# Altium PCB ESP-3D.PcbDoc
Units mm, origin at the board's own origin, x right, y up, seen from the top; angles counter-clockwise.
Board outline 17.52 x 21.3 mm, 2 copper layers (Top Layer, Bottom Layer); 17 components, 16 nets, 57 pads, 29 vias.
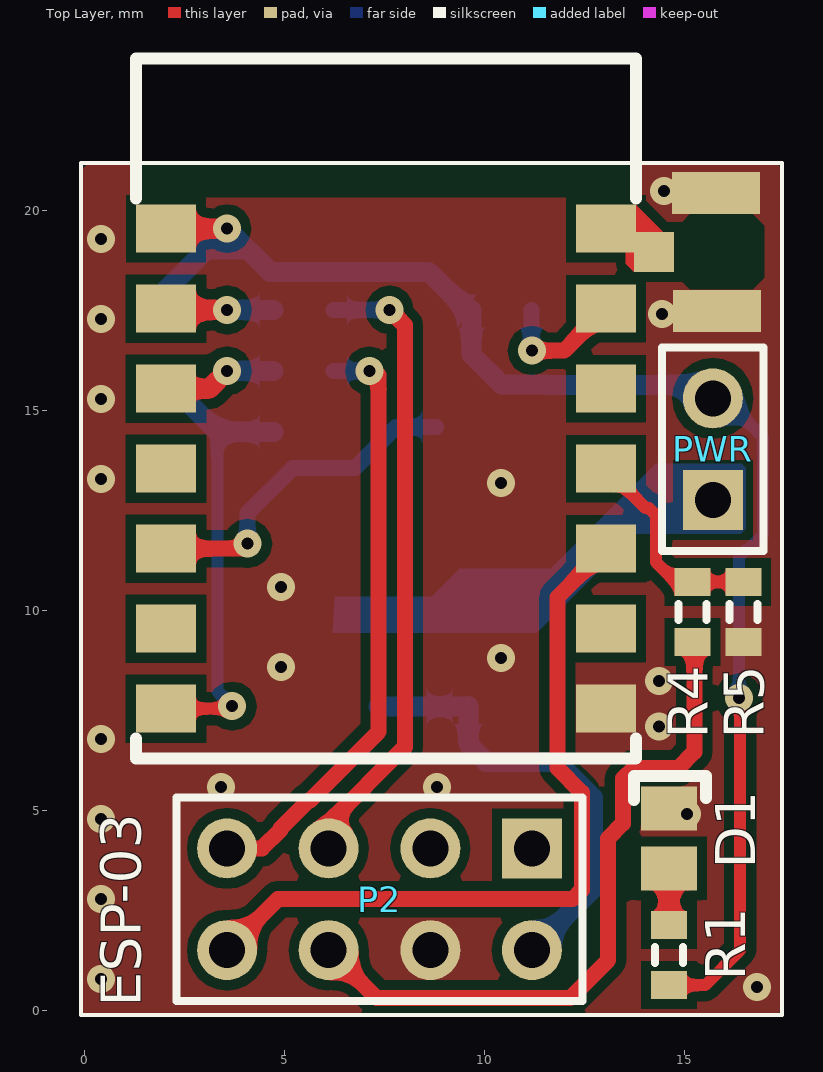
[diagram p0: Top Layer view]
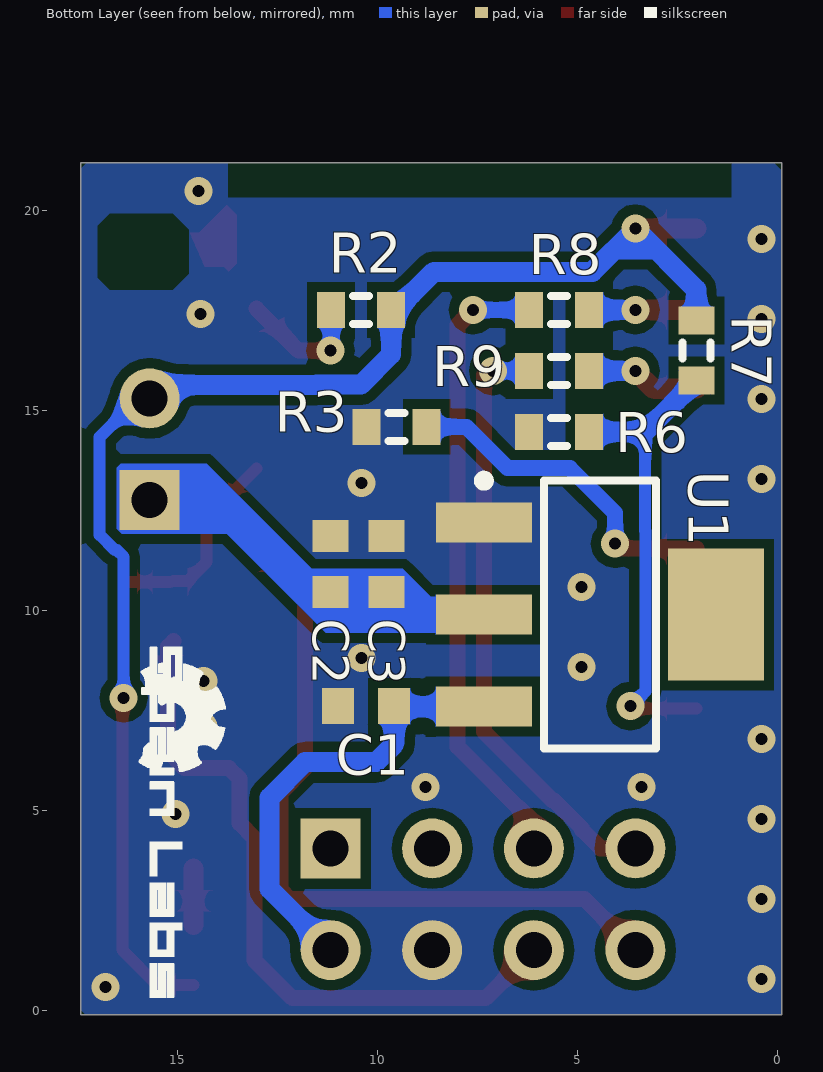
[diagram p1: Bottom Layer view, seen from below]

## Layer stack, top to bottom
Top Solder: solder mask 0.0102, Solder Resist, Dk 3.5
Top Layer: signal copper 0.0356
Dielectric 1: dielectric 0.32, FR-4, Dk 4.8
Bottom Layer: signal copper 0.0356
Bottom Solder: solder mask 0.0102, Solder Resist, Dk 3.5

## Board outline
-0.1,-0.1 -0.1,21.2 17.425,21.2 17.425,-0.1

## Design rules (kind name [scope] priority, off if disabled: settings)
Clearance [All] p1: gap=0.254
PlaneConnect [All] p1: planeconnectstyle=Direct reliefexpansion=0.508 reliefentries=4 reliefconductorwidth=0.254 reliefairgap=0.254
PolygonConnect [All] p1: connectstyle=Direct reliefconductorwidth=0.254 reliefentries=4 polygonreliefangle="90 Angle" airgapwidth=0.254
RoutingVias [All] p1: holewidth=0.3 width=0.7 viastyle="Through Hole" minholewidth=0.3 minwidth=0.7 maxholewidth=1 maxwidth=1
SolderMaskExpansion [All] p1: expansion=0.102
Width [All] p1: maxlimit=1 minlimit=0.2 preferedwidth=0.2
29 further rules are at their usual default settings.

## Components (designator, comment, footprint, x,y, rotation, side; value= is the part's Value field where it differs from the comment)
C1 "Cap Semi" 1608[0603] 10.287,7.62 r180 bottom
C2 "Cap Semi" 1608[0603] 11.176,11.176 r270 bottom
C3 "Cap Semi" 1608[0603] 9.779,11.176 r270 bottom
D1 "LED2" C0805 14.605,4.318 r90 top
ESP-03 "ESP-03" ESP-03 2.032,19.558 r0 top (schematic designator ESP1)
P2 "Header 4X2A" HDR2X4_CEN 11.176,4.064 r180 top
PWR "Header 2" HDR1X2 15.7,12.775 r90 top (schematic designator P1)
R1 "JMP" J1-0603 14.605,1.397 r90 top
R2 "JMP" J1-0603 10.414,17.526 r180 bottom
R3 "JMP" J1-0603 9.525,14.605 r180 bottom
R4 "JMP" J1-0603 15.19,9.977 r90 top
R5 "JMP" J1-0603 16.46,9.977 r90 top
R6 "JMP" J1-0603 5.461,14.478 r180 bottom
R7 "P" J1-0603 2.032,16.51 r90 bottom
R8 "JMP" J1-0603 5.461,17.526 r180 bottom
R9 "JMP" J1-0603 5.461,16.002 r180 bottom
U1 "AMS1117" SOT223_N 4.445,9.906 r180 bottom

## Footprints (in the part's own frame and the unit in brackets; to place one, negate y for a bottom-side part, rotate by r counter-clockwise, add the part's x,y. Pads: shape width x height; smd on the part's side, far side on the other; paste and mask are expansions set on the pad)
1608[0603] [mm] "Chip Capacitor, Body 1.6x0.8mm, IPC High Density"
  rect 0.8x0.9 smd: 1(-0.7,0) 2(0.7,0)
  body extent -0.87,-0.48 0.87,0.48, height 1.3
C0805 [mm] "Chip Capacitor, Body 2.0x1.3mm, IPC High Density"
  rect 1.1x1.4 smd: 1(-0.75,0) 2(0.75,0)
  body extent -1.1,-0.72 1.1,0.72, height 1.4
ESP-03 [mm]
  rect 1.5x1.2 smd: 1(0,0) 2(0,-2) 3(0,-4) 4(0,-6) 5(0,-8) 6(0,-10) 7(0,-12) 8(11,-12) 9(11,-10) 10(11,-8) 11(11,-6) 12(11,-4) 13(11,-2) 14(11,0)
  silkscreen extent -0.75,-13.25 11.75,4.25, body extent -0.65,-13.25 11.65,4.05, height 3.42
HDR1X2 [mm] "Connector; Header; 2 Position"
  rect 1.5x1.5 hole 0.9: 1(0,0)
  round 1.5 hole 0.9: 2(2.54,0)
  silkscreen extent -1.27,-1.27 3.81,1.27
HDR2X4_CEN [mm] "Connector; Header; 4x2 Position"
  rect 1.5x1.5 hole 0.9: 1(0,0)
  round 1.5 hole 0.9: 2(2.54,0) 3(5.08,0) 4(7.62,0) 5(0,2.54) 6(2.54,2.54) 7(5.08,2.54) 8(7.62,2.54)
  silkscreen extent -1.27,-1.27 8.89,3.81
J1-0603 [mm] "Chip Resistor, Body 1.6x0.8mm, IPC High Density"
  rect 0.7x0.9 smd: 1(-0.75,0) 2(0.75,0)
  silkscreen extent -0.2,-0.35 0.2,0.35, body extent -0.85,-0.48 0.85,0.48, height 0.9
SOT223_N [mm] "SOT223, 4-Leads, Body 6.5x3.5mm, Pitch 2.3mm, Lead Span 7mm, IPC Medium Density"
  rect 2.4x1 smd: 1(-2.9,2.3) 2(-2.9,0) 3(-2.9,-2.3)
  rect 2.4x3.3 smd: 4(2.9,0)
  silkscreen extent -3.03,-3.35 1.4,3.47, body extent -1.85,-3.35 1.85,3.35, height 1.7

## Part data
C1 C2 C3: "Capacitor (Semiconductor SIM Model)"
D1: "Typical RED, GREEN, YELLOW, AMBER GaAs LED"
P2: "Header, 4-Pin, Dual row"
PWR: "Header, 2-Pin"
R1 R2 R3 R4 R5 R6 R7 R8 R9: library part Res3, "Resistor"

## Free pads (board coordinates)
  rect 2.2x1.05 smd: 16(15.775,20.45) 17(15.8,17.5)
  rect 1x1 smd: 18(14.225,18.975)

## Via types
v1: diameter 0.7, hole 0.3, Top Layer to Bottom Layer, tented both sides, 29 vias

## Nets (pads, with @x,y where several pads share a name; then routed paths per layer and width w, separated by ;. In a path a pad name is that pad's centre, name@x,y a point inside that pad or via, vN(x,y) a via of type N, cw(c..) or ccw(c..) an arc to the next point about the centre after c; other vN are vias at no path point)
3.3V: C2.2 C3.2 PWR.1 U1.2 | length 9.5
  Bottom Layer w0.3: C2.2@11.325,10.475 11.326,10.476 13.625,12.775 PWR.1
  Bottom Layer w0.5: U1.2 9.209,9.906 C3.2 C2.2 C2.2@11.326,10.476
ANT: ESP-03.14 pad.18
GND: C1.1 C2.1 C3.1 D1.2 ESP-03.8 P2.6 pad.16 pad.17 R3.1 R5.1 R6.1 U1.1
  other v1: 16.8,0.6 0.4,0.8 0.4,2.8 0.4,4.8 15.05,4.925 3.4,5.6 8.8,5.6 0.4,6.8 14.351,7.112 14.351,8.255 4.9,8.6 10.401,8.825 4.9,10.6 10.4,13.2 0.4,13.3 0.4,15.3 0.4,17.3 14.425,17.425 0.4,19.3 14.475,20.5
IO12: ESP-03.3 R9.2 | length 2.9
  Top Layer w0.5: ESP-03.3 3.112,15.558 v1(3.556,16.002)
  Bottom Layer w0.5: v1(3.556,16.002) R9.2
IO14: ESP-03.2 R8.2 | length 2.6
  Top Layer w0.5: ESP-03.2@2.064,17.526 v1(3.556,17.526)
  Bottom Layer w0.5: v1(3.556,17.526) R8.2
NetD1_1: D1.1 R1.2 | length 1.4
  Top Layer w0.5: R1.2 D1.1
NetESP1_5: ESP-03.5 R3.2 | length 8.5
  Top Layer w0.4: ESP-03.5 3.938,11.558 v1(4.064,11.684)
  Bottom Layer w0.4: v1(4.064,11.684) 4.064,12.446 5.192,13.574 6.749,13.574 7.78,14.605 R3.2
NetESP1_7: ESP-03.7 R6.2 R7.1 | length 11.9
  Top Layer w0.3: ESP-03.7 3.621,7.558 v1(3.683,7.62)
  Bottom Layer w0.3: 3.314,14.478 3.314,12 3.31,11.996 3.31,7.993 v1(3.683,7.62)
  Bottom Layer w0.5: R7.1 3.314,14.478 R6.2
NetESP1_11: ESP-03.11 R4.2 R5.2 | length 5
  Top Layer w0.3: ESP-03.11 14.015,12.575 14.1,12.575 14.275,12.4 14.275,11.225 14.75,10.75 R4.2@15.1,10.75 ; R4.2 R5.2@16.273,10.727
NetESP1_13: ESP-03.13 R2.1 | length 3.3
  Top Layer w0.4: v1(11.176,16.51) 11.984,16.51 ESP-03.13
  Bottom Layer w0.4: R2.1 11.164,16.522 v1(11.176,16.51)
NetP2_3: P2.3 R8.1 | length 15.8
  Top Layer w0.4: P2.3 6.096,4.699 8.001,6.604 8.001,17.145 v1(7.62,17.526)
  Bottom Layer w0.4: R8.1 v1(7.62,17.526)
NetP2_4: P2.4 R9.1 | length 15.1
  Top Layer w0.4: P2.4 4.426,4.064 4.892,4.53 4.892,4.563 5.597,5.268 5.63,5.268 7.347,6.985 7.347,15.894 7.239,16.002 v1(7.112,16.002)
  Bottom Layer w0.4: R9.1 v1(7.112,16.002)
RX: P2.7 R4.1 | length 17.5
  Top Layer w0.4: P2.7 7.3,0.32 12.131,0.32 13.081,1.27 13.081,4.318 13.451,4.688 13.451,5.806 13.717,6.072 14.835,6.072 15.24,6.477 15.24,9.11 R4.1@15.1,9.25
TX: ESP-03.10 P2.8 | length 18.8
  Top Layer w0.4: P2.8 4.826,2.794 12.192,2.794 12.427,3.029 12.427,5.461 11.811,6.077 11.811,10.337 ESP-03.10
VCC: ESP-03.1 PWR.2 R1.1 R2.2 R7.2 | length 35.6
  Top Layer w0.3: R1.1 15.506,0.647 16.383,1.524 16.383,7.792 v1(16.35,7.825)
  Top Layer w0.5: ESP-03.1 v1(3.556,19.558)
  Bottom Layer w0.3: PWR.2@15.925,15.375 16.95,14.35 16.95,11.904 16.567,11.521 16.517,11.521 16.35,11.354 v1(16.35,7.825)
  Bottom Layer w0.5: R7.2 2.032,18.034 v1(3.556,19.558) 4.634,18.48 8.595,18.48 R2.2@9.65,17.425 ; R2.2 9.664,16.411 10.419,15.656 11.53,15.656 11.524,15.65 15.175,15.65 PWR.2@15.55,15.275
VIN: C1.2 P2.5 U1.3 | length 11.3
  Bottom Layer w0.5: U1.3 C1.2@9.573,7.606 ; C1.2 9.587,6.669 10.033,6.223 11.811,6.223 12.7,5.334 12.7,3.048 P2.5
pads on no net: ESP-03.4 ESP-03.6 ESP-03.9 ESP-03.12 P2.1 P2.2 U1.4

## Polygon pours and split planes (outlines as drawn)
GND on Bottom Layer "Top Layer-No Net" (solid, pour order 4): -0.1,-0.1 -0.1,21 0.1,21.2 17.25,21.2 17.275,21.2 17.425,21.05 17.425,0.025 17.3,-0.1 17.225,-0.1
GND on Top Layer "Top Layer-No Net" (solid, pour order 3): -0.1,-0.1 -0.1,21 0.1,21.2 17.25,21.2 17.275,21.2 17.425,21.05 17.425,0.025 17.3,-0.1 17.225,-0.1

## Other copper
Top Layer:
  pour cut-out: 1.15,21.2 1.15,20.35 1.15,20.325 13.75,20.325 13.75,21.2
  pour cut-out: 14.725,19.525 15.125,19.925 16.7,19.925 17,19.625 17,18.325 16.7,18.025 15.125,18.025 14.725,18.425
  region net ANT: 14.7,19.45 14.475,19.45 13.775,20.15 13.525,19.9 13.525,18.675 13.725,18.475 13.85,18.6 14.325,18.6
Bottom Layer:
  pour cut-out: 1.15,21.2 1.15,20.35 1.15,20.325 13.75,20.325 13.75,21.2
  pour cut-out: 14.725,19.525 15.125,19.925 16.7,19.925 17,19.625 17,18.325 16.7,18.025 15.125,18.025 14.725,18.425
  region net 3.3V: 6.25,10.35 8.675,10.35 9.375,11.05 11.65,11.05 14.275,13.675 16.425,13.675 16.525,13.575 16.525,12.05 16.4,11.925 13.775,11.925 11.3,9.45 6.2,9.45
  region net VCC: 2.794,18.796 4.318,18.796 3.556,19.558

## Silkscreen, mask and mechanical layers (free items; w line width, h text height)
Top Overlay:
  lines w0.1: -0.1,-0.1 -0.1,21.2 17.425,21.2 17.425,-0.1 -0.1,-0.1
  lines w0.3: 13.725,5.275 13.725,5.875 15.425,5.875 15.525,5.875 15.525,5.325
Bottom Overlay:
  drawing of 1105 lines, arcs and shapes, not listed
Mechanical 15:
  the board outline again, w0.05

## Panel: embedded boards
"" at 1.7,18.775, 2 rows x 2 columns, spacing 50 x 50, rotation 0